# EAGLE board main_board (EAGLE 9.6.2)
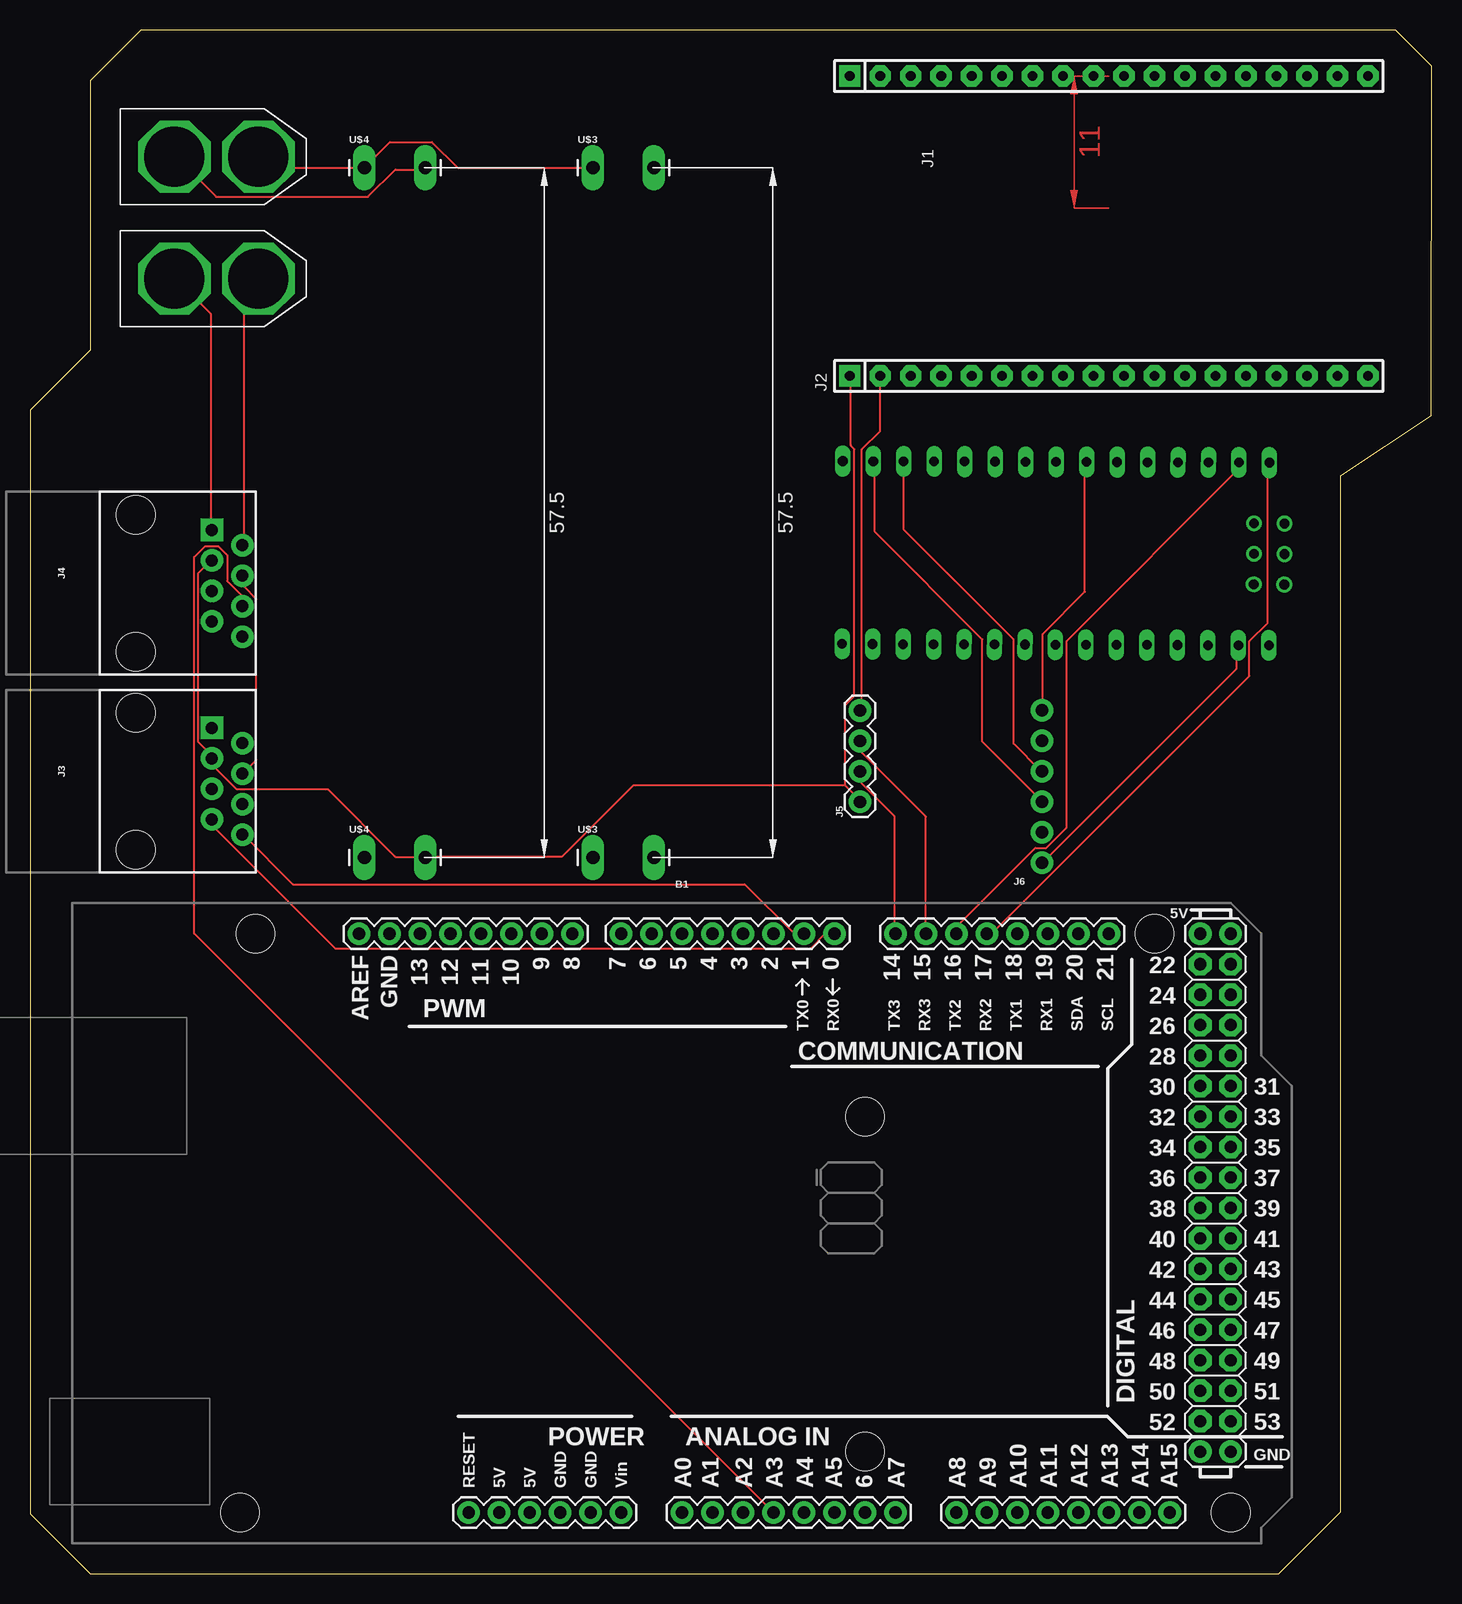
[diagram p0: board, top side]
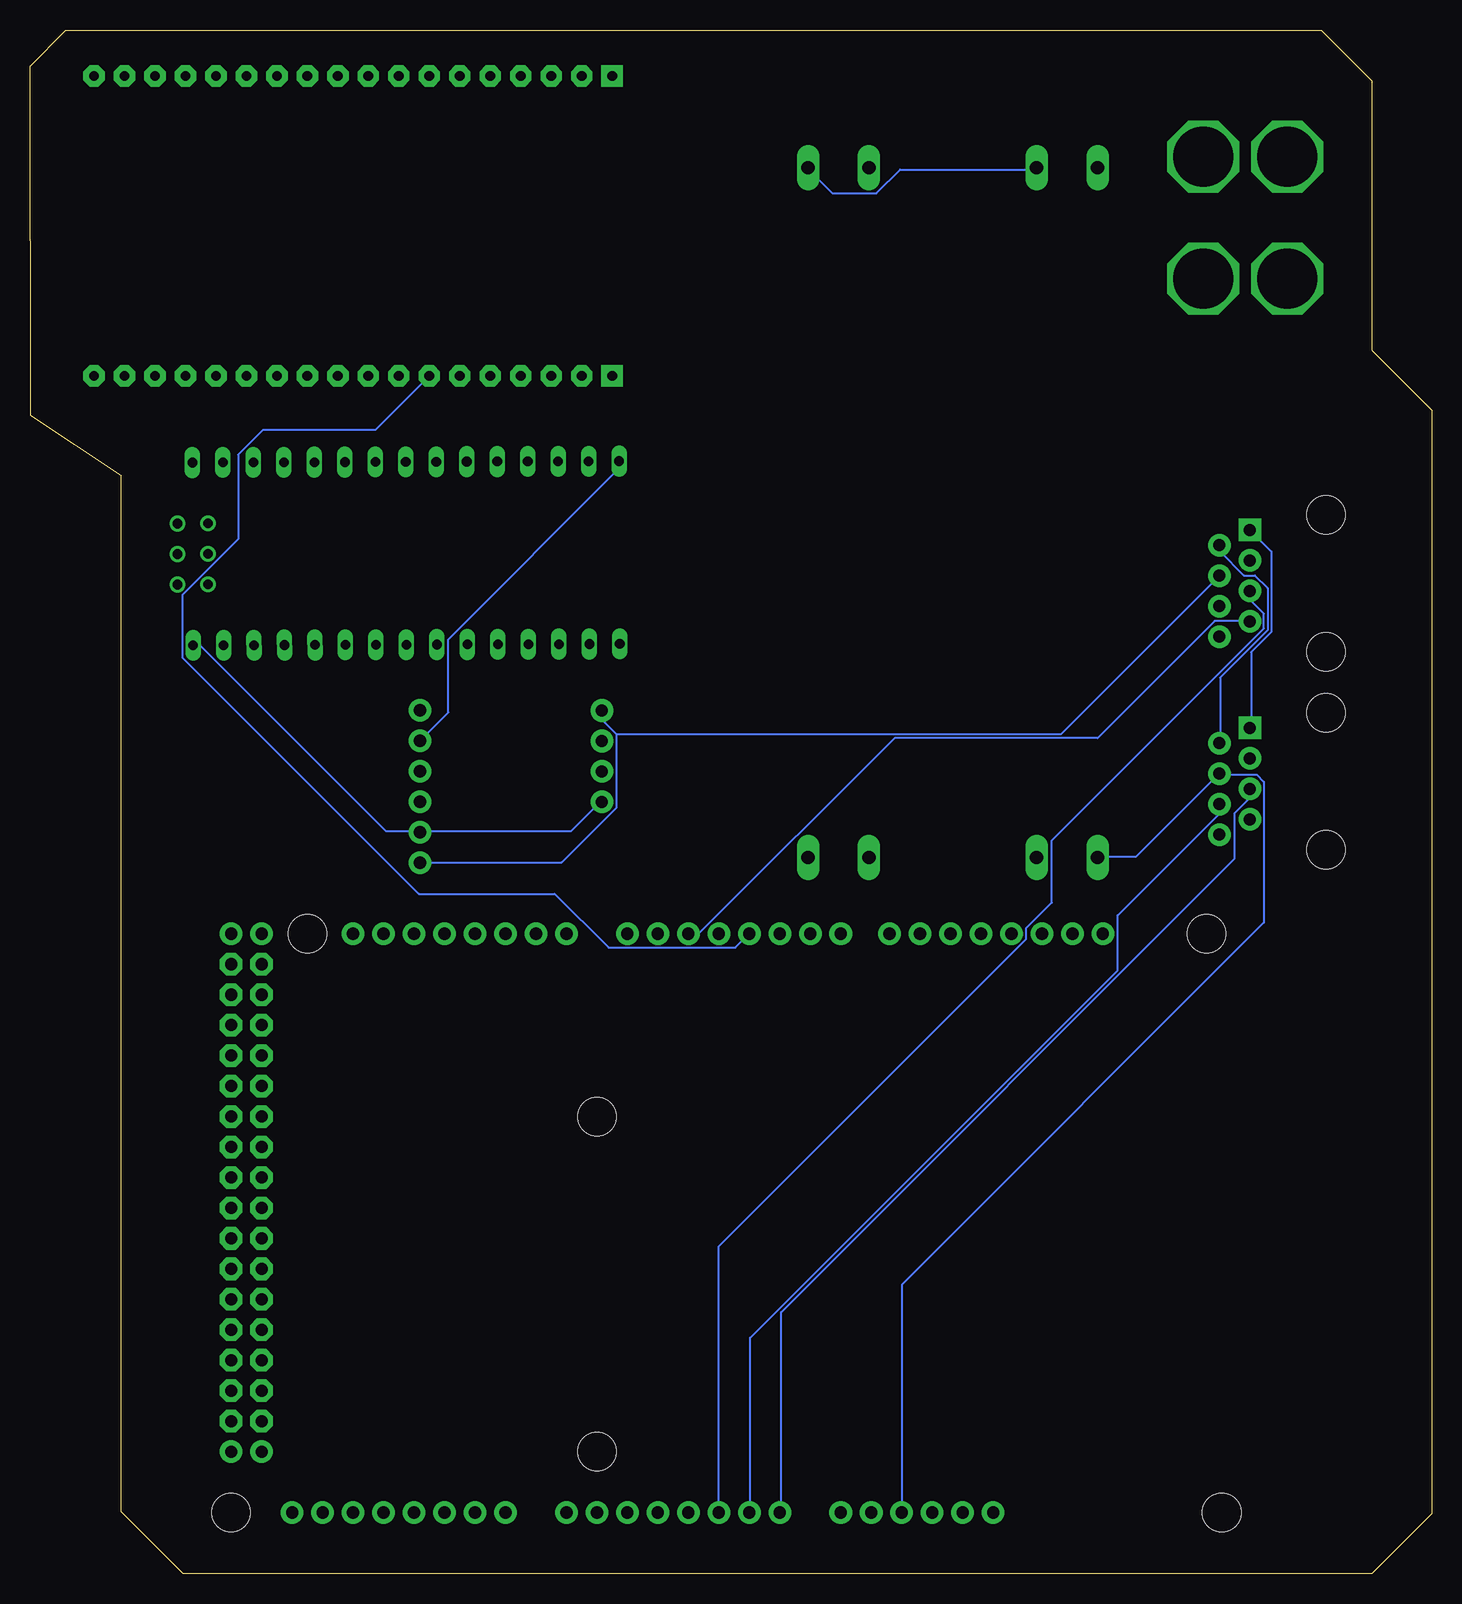
[diagram p1: board, bottom side, seen from below]

Size 116.82 x 128.67 mm. Coordinates in mm from the lower left corner, seen from the top.
Outline: 116.76,96.52 116.82,125.66 113.82,128.67 9.21,128.67 5,124.46 5,102 0,97 0,5 5,0 104.06,0 109.21,5.15 109.21,91.51 116.76,96.52
Copper layers (1*16): Top 0.035mm / dielectric 1.5mm / Bottom 0.035mm
Design rules "default": minimum track width 6mil, minimum drill 0.35mm, track to track 6mil, track to pad 6mil, pad to pad 6mil, via to via 6mil, smd to smd 6mil, copper to edge 40mil, drill to drill 6mil, minimum pad ring 10mil, minimum via ring 8mil, stop-mask expansion 4mil, vias tented up to drill 0mil, thermal gap 10mil

## Footprints (pad centres in the part's own frame; a part is rotated, then mirrored left to right if it is on the bottom)
ARDUINO_MEGA = drill 1.016 pad 1.88: 0 13.97,24.13; 1 11.43,24.13; 2 8.89,24.13; 3 6.35,24.13; 3.3V -13.97,-24.13; 4 3.81,24.13; 5 1.27,24.13; 5V@0 -11.43,-24.13; 5V@1 44.45,24.13; 5V@2 46.99,24.13; 6 -1.27,24.13; 7 -3.81,24.13; 8 -7.874,24.13; 9 -10.414,24.13; 10 -12.954,24.13; 11 -15.494,24.13; 12 -18.034,24.13; 13 -20.574,24.13; 14 19.05,24.13; 15 21.59,24.13; 16 24.13,24.13; 17 26.67,24.13; 18 29.21,24.13; 19 31.75,24.13; 20 34.29,24.13; 21 36.83,24.13; A0 1.27,-24.13; A1 3.81,-24.13; A2 6.35,-24.13; A3 8.89,-24.13; A4 11.43,-24.13; A5 13.97,-24.13; A6 16.51,-24.13; A7 19.05,-24.13; A8 24.13,-24.13; A9 26.67,-24.13; A10 29.21,-24.13; A11 31.75,-24.13; A12 34.29,-24.13; A13 36.83,-24.13; A14 39.37,-24.13; A15 41.91,-24.13; AREF -25.654,24.13; GND@0 -8.89,-24.13; GND@1 -6.35,-24.13; GND@2 44.45,-19.05; GND@3 46.99,-19.05; GND@4 -23.114,24.13; RESET -16.51,-24.13; VIN -3.81,-24.13 | drill 1.016 pad 1.88 octagon: 22 44.45,21.59; 23 46.99,21.59; 24 44.45,19.05; 25 46.99,19.05; 26 44.45,16.51; 27 46.99,16.51; 28 44.45,13.97; 29 46.99,13.97; 30 44.45,11.43; 31 46.99,11.43; 32 44.45,8.89; 33 46.99,8.89; 34 44.45,6.35; 35 46.99,6.35; 36 44.45,3.81; 37 46.99,3.81; 38 44.45,1.27; 39 46.99,1.27; 40 44.45,-1.27; 41 46.99,-1.27; 42 44.45,-3.81; 43 46.99,-3.81; 44 44.45,-6.35; 45 46.99,-6.35; 46 44.45,-8.89; 47 46.99,-8.89; 48 44.45,-11.43; 49 46.99,-11.43; 50 44.45,-13.97; 51 46.99,-13.97; 52 44.45,-16.51; 53 46.99,-16.51 | hole 3.2: -34.29,24.13; -35.56,-24.13; 16.51,8.89; 16.51,-19.05; 40.64,24.13; 46.99,-24.13
SIP-100-18-32 = drill 0.813 pad 1.778 square: 1 -21.59,0 | drill 0.813 pad 1.778 octagon: 2 -19.05,0; 3 -16.51,0; 4 -13.97,0; 5 -11.43,0; 6 -8.89,0; 7 -6.35,0; 8 -3.81,0; 9 -1.27,0; 10 1.27,0; 11 3.81,0; 12 6.35,0; 13 8.89,0; 14 11.43,0; 15 13.97,0; 16 16.51,0; 17 19.05,0; 18 21.59,0
RJ45-8 = drill 1 pad 1.88 square: 1 -4.445,6.35 | drill 1 pad 1.88: 2 -3.175,8.89; 3 -1.905,6.35; 4 -0.635,8.89; 5 0.635,6.35; 6 1.905,8.89; 7 3.175,6.35; 8 4.445,8.89 | hole 3.2: -5.715,0; 5.715,0
1X04 = drill 1.016 pad 1.88: 1 0,0; 2 2.54,0; 3 5.08,0; 4 7.62,0
1X06_NO_SILK = drill 1.016 pad 1.88: 1 0,0; 2 2.54,0; 3 5.08,0; 4 7.62,0; 5 10.16,0; 6 12.7,0
NANO = drill 0.8 long: 3.3V -10.16,24.13; 5V -10.16,-1.27; A0 -10.16,19.05; A1 -10.16,16.51; A2 -10.16,13.97; A3 -10.16,11.43; A4 -10.16,8.89; A5 -10.16,6.35; A6 -10.16,3.81; A7 -10.16,1.27; AREF -10.16,21.59; D2 5.08,1.27; D3 5.08,3.81; D4 5.08,6.35; D5 5.08,8.89; D6 5.08,11.43; D7 5.08,13.97; D8 5.08,16.51; D9 5.08,19.05; D10 5.08,21.59; D11 5.08,24.13; D12 5.08,26.67; D13 -10.16,26.67; GND -10.16,-6.35; GND1 5.08,-1.27; RAW -10.16,-8.89; RST -10.16,-3.81; RST1 5.08,-3.81; RX1 5.08,-6.35; TX0 5.08,-8.89 | drill 0.8: ICSP1 -5.08,-10.16; ICSP2 -5.08,-7.62; ICSP3 -2.54,-10.16; ICSP4 -2.54,-7.62; ICSP5 0,-10.16; ICSP6 0,-7.62
XT60 = drill 5 octagon: + 4.5,0; - 11.5,0
1X03_LONGPADS = drill 1.118 pad 1.88 long: VIN+ 5.08,57.5; VIN- 0,57.5; VOUT+ 5.08,0; VOUT- 0,0

## Placement (x,y rotation side)
B1  ARDUINO_MEGA_R3FULL  [ARDUINO_MEGA]  53.07,29.21 0 top
J1  F-1X18-SIP-100-32  [SIP-100-18-32]  89.9,124.83 0 top
J2  F-1X18-SIP-100-32  [SIP-100-18-32]  89.9,99.83 0 top
J3  RJ45  [RJ45-8]  8.81,66.04 270 top
J4  RJ45  [RJ45-8]  8.81,82.55 270 top
J5  [1X04]  69.17,64.32 90 top
J6  [1X06_NO_SILK]  84.33,59.26 90 top
U$1  NANO  [NANO]  94.38,87.56 89.8 top
U$2  XT60  [XT60]  7.54,118.11 0 top
U$3  BUCKPINSBUCK  [1X03_LONGPADS]  46.91,59.69 0 top
U$4  BUCKPINSBUCK  [1X03_LONGPADS]  27.86,59.69 0 top
U$5  XT60  [XT60]  7.54,107.95 0 top

## Library data of the parts
B1 = SparkFun-Boards
J1 J2 = con-headers-jp
J3 J4 = SparkFun-Connectors; PROD_ID: CONN-08506; SF_ID: PRT-00643
J5 = SparkFun-Connectors; PROD_ID: CONN-09696
J6 = SparkFun-Connectors
U$1 = Arduino-clone
U$2 U$5 = XT60
U$3 U$4 = buck

## Nets
5V: J2.1 J3.3 J4.3 J5.1 J6.2 U$1.RAW U$4.VOUT+
5VGND: B1.GND@0 J2.2 J3.4 J4.4 J5.4 J6.1 U$1.GND U$4.VOUT-
7V: U$3.VOUT+
7VGND: U$3.VOUT-
20V: U$2.+ U$3.VIN+ U$4.VIN+
20VGND: U$2.- U$3.VIN- U$4.VIN-
24V: J3.1 J4.1 U$5.+
24VGND: J3.2 J4.2 U$5.-
BUSY: B1.4 J2.7
CS: J6.6 U$1.D4
HALL_EFFECT_1: B1.0 J3.7
HALL_EFFECT_2: B1.1 J3.8
HALL_EFFECT_3: B1.2 J4.7
LINEAR_ENCODER_1: B1.A0 J3.5
LINEAR_ENCODER_2: B1.A1 J3.6
LINEAR_ENCODER_3: B1.A2 J4.5
LINEAR_ENCODER_4: B1.A3 J4.6
MEGARX2: B1.17 U$1.TX0
MEGARX3: B1.15 J5.3
MEGATX2: B1.16 U$1.RX1
MEGATX3: B1.14 J5.2
MISO: J6.3 U$1.D11
MOSI: J6.4 U$1.D10
RX2: J1.4
SCK: J6.5 U$1.D12
TX2: J1.5

## Tracks (layer width: path | path; a pad name or v marks a point on that pad's centre or on a via)
5V
  Top 0.152: J4.3 15.06,84.43 13.99,83.36 13.99,69.34 15.06,68.28 15.06,67.97 J3.3 15.21,67.82 15.21,67.36 17.19,65.38 24.81,65.38 30.45,59.74 32.89,59.74 U$4.VOUT+ 33.04,59.74 44.32,59.74 50.26,65.68 67.94,65.68 | 67.94,65.68 67.94,72.39 68.7,73.15 68.7,93.73 68.4,94.03 68.4,99.82 J2.1 | 67.94,65.68 69.16,64.47 J5.1
  Bottom 0.152: U$1.RAW 103.15,77.27 102.54,77.27 87.14,61.87 84.4,61.87 J6.2 84.25,61.87 71.75,61.87 69.31,64.31 J5.1
5VGND
  Top 0.152: J2.2 70.84,99.82 70.84,95.25 69.31,93.73 69.31,72.08 J5.4 | U$1.GND 100.56,77.27 100.56,75.44 84.4,59.28 J6.1 | J4.4 17.8,83.06 17.8,82.3 18.87,81.23 18.87,67.82 17.8,66.75 J3.4
  Bottom 0.152: 67.94,69.95 69.16,71.17 J5.4 | 67.94,69.95 67.94,63.86 72.51,59.28 84.25,59.28 J6.1 | B1.GND@0 44.17,5.18 44.17,24.08 13.99,54.25 13.99,65.99 14.6,66.6 17.65,66.6 J3.4 17.8,66.6 24.66,59.74 27.86,59.74 U$4.VOUT- | 67.94,69.95 30.91,69.95 17.8,83.06 J4.4
20V
  Top 0.152: U$4.VIN+ 32.89,117.04 30.45,117.04 28.16,114.76 15.52,114.76 12.16,118.11 U$2.+
  Bottom 0.152: U$4.VIN+ 33.04,117.04 44.32,117.04 46.3,115.06 49.96,115.06 51.94,117.04 U$3.VIN+
20VGND
  Top 0.152: U$4.VIN- 20.09,117.2 19.17,118.11 U$2.- | U$4.VIN- 29.99,119.33 33.5,119.33 35.63,117.2 U$3.VIN- | U$4.VIN-
24V
  Top 0.152: J4.1 15.06,87.02 15.06,105 12.16,107.9 U$5.+
  Bottom 0.152: J3.1 15.06,70.56 15.06,76.81 13.38,78.49 13.38,85.19 15.06,86.87 J4.1
24VGND
  Top 0.152: J4.2 17.8,85.8 17.8,106.68 19.02,107.9 U$5.-
  Bottom 0.152: J3.2 17.65,69.34 17.65,74.68 13.69,78.64 13.69,82.14 14.75,83.21 15.67,83.21 17.65,85.19 17.65,85.65 J4.2
BUSY
  Bottom 0.152: J2.7 88.06,95.32 97.42,95.32 99.47,93.26 99.47,86.23 104.12,81.58 104.12,76.35 84.42,56.66 73.1,56.66 68.62,52.17 58.05,52.17 B1.4
CS
  Top 0.152: U$1.D4 87.91,92.66 87.91,81.84 84.4,78.33 84.4,72.08 J6.6
HALL_EFFECT_1
  Top 0.152: B1.0 66.27,53.34 65.05,52.12 25.42,52.12 15.21,62.33 15.21,62.79 J3.7
HALL_EFFECT_2
  Top 0.152: B1.1 63.67,53.34 59.56,57.45 21.92,57.45 17.8,61.57 J3.8
HALL_EFFECT_3
  Bottom 0.152: B1.2 61.08,53.34 44.78,69.65 27.86,69.65 18.11,79.4 15.21,79.4 J4.7
LINEAR_ENCODER_1
  Bottom 0.152: J3.5 15.21,65.38 15.21,64.62 16.43,63.4 16.43,59.59 54.23,21.79 54.23,5.18 B1.A0
LINEAR_ENCODER_2
  Bottom 0.152: J3.6 17.8,64.01 17.8,63.25 26.18,54.86 26.18,50.29 56.82,19.66 56.82,5.18 B1.A1
LINEAR_ENCODER_3
  Bottom 0.152: J4.5 15.06,81.84 15.06,81.08 13.99,80.01 13.99,78.79 31.67,61.11 31.67,55.93 33.8,53.8 33.8,52.88 59.41,27.28 59.41,5.18 B1.A2
LINEAR_ENCODER_4
  Top 0.152: J4.6 17.65,80.77 17.65,81.53 16.43,82.75 16.43,84.89 15.67,85.65 14.6,85.65 13.69,84.73 13.69,53.34 61.84,5.18 B1.A3
MEGARX2
  Top 0.152: B1.17 80.13,53.34 101.62,74.83 101.62,77.72 103.15,79.25 103.15,92.51 U$1.TX0
MEGARX3
  Top 0.152: J5.3 69.31,69.34 69.31,68.43 74.65,63.09 74.65,53.34 B1.15
MEGATX2
  Top 0.152: U$1.RX1 100.71,92.51 100.71,92.05 86.38,77.72 86.38,62.18 84.7,60.5 83.79,60.5 77.24,53.95 77.24,53.34 B1.16
MEGATX3
  Top 0.152: J5.2 69.31,66.75 69.31,65.84 72.06,63.09 72.06,53.34 B1.14
MISO
  Top 0.152: U$1.D11 70.38,92.66 70.38,86.87 79.37,77.88 79.37,69.34 84.25,64.47 J6.3
MOSI
  Top 0.152: U$1.D10 72.82,92.66 72.82,87.02 81.96,77.88 81.96,69.19 84.25,66.9 J6.4
SCK
  Bottom 0.152: U$1.D12 67.79,92.66 67.79,92.05 81.96,77.88 81.96,71.78 84.25,69.49 J6.5
(copper drawn outside any net)
  shapes: Top area x2